# EAGLE board MegaShieldTrio (EAGLE 6.4)

Size 99.82 x 80.01 mm. Coordinates in mm from the lower left corner, seen from the top.
Outline: 10.16,65.28 10.16,66.29
Outline: 6.35,80 0,80 0,0 99.82,0 99.82,79.5 arc90 99.31,80.01 6.35,80
Copper layers (1*16): Top 0.0178mm / dielectric 59mil / Bottom 0.0178mm
Design rules "SSC-EAGLE-2Lyr_v1.0.0.3": minimum track width 6mil, minimum drill 14mil, track to track 6mil, track to pad 6mil, pad to pad 6mil, via to via 6mil, smd to smd 6mil, copper to edge 20mil, drill to drill 16mil, minimum pad ring 8mil, minimum via ring 8mil, stop-mask expansion 3mil, vias tented up to drill 0mil, thermal gap 10mil
Net classes: 0 default: width 0.152 mm, drill 0.305 mm, clearance 0.152 mm
Holes 3.2 mm at 24.13,50.8 30.48,2.54 54.61,17.78 54.61,45.72

## Footprints (pad centres in the part's own frame; a part is rotated, then mirrored left to right if it is on the bottom)
1X15 = drill 1.016 long: 1 -17.78,0; 2 -15.24,0; 3 -12.7,0; 4 -10.16,0; 5 -7.62,0; 6 -5.08,0; 7 -2.54,0; 8 0,0; 9 2.54,0; 10 5.08,0; 11 7.62,0; 12 10.16,0; 13 12.7,0; 14 15.24,0; 15 17.78,0
1X15HEADER = drill 0.8 square: P$1 -17.78,0; P$2 -15.24,0; P$3 -12.7,0; P$4 -10.16,0; P$5 -7.62,0; P$6 -5.08,0; P$7 -2.54,0; P$8 0,0; P$9 2.54,0; P$10 5.08,0; P$11 7.62,0; P$12 10.16,0; P$13 12.7,0; P$14 15.24,0; P$15 17.78,0
1X6HEADER = drill 0.8 square: P$1 0,0; P$2 2.54,0; P$3 5.08,0; P$4 7.62,0; P$5 10.16,0; P$6 12.7,0
1X08 = drill 1.016 long: 1 -8.89,0; 2 -6.35,0; 3 -3.81,0; 4 -1.27,0; 5 1.27,0; 6 3.81,0; 7 6.35,0; 8 8.89,0
1X8HEADER = drill 0.8 square: P$1 0,0; P$2 2.54,0; P$3 5.08,0; P$4 7.62,0; P$5 10.16,0; P$6 12.7,0; P$7 15.24,0; P$8 17.78,0
1X05 = drill 1.016 long: 1 -5.08,0; 2 -2.54,0; 3 0,0; 4 2.54,0; 5 5.08,0
2X09 = drill 1.016 octagon: 1 -10.16,-1.27; 2 -10.16,1.27; 3 -7.62,-1.27; 4 -7.62,1.27; 5 -5.08,-1.27; 6 -5.08,1.27; 7 -2.54,-1.27; 8 -2.54,1.27; 9 0,-1.27; 10 0,1.27; 11 2.54,-1.27; 12 2.54,1.27; 13 5.08,-1.27; 14 5.08,1.27; 15 7.62,-1.27; 16 7.62,1.27; 17 10.16,-1.27; 18 10.16,1.27
2X08 = drill 1.016 octagon: 1 -8.89,-1.27; 2 -8.89,1.27; 3 -6.35,-1.27; 4 -6.35,1.27; 5 -3.81,-1.27; 6 -3.81,1.27; 7 -1.27,-1.27; 8 -1.27,1.27; 9 1.27,-1.27; 10 1.27,1.27; 11 3.81,-1.27; 12 3.81,1.27; 13 6.35,-1.27; 14 6.35,1.27; 15 8.89,-1.27; 16 8.89,1.27
2X03 = drill 1.016 octagon: 1 -2.54,-1.27; 2 -2.54,1.27; 3 0,-1.27; 4 0,1.27; 5 2.54,-1.27; 6 2.54,1.27
JP2 = drill 0.914 long: 1 -2.54,0; 2 0,0; 3 2.54,0
1X10 = drill 1.016 long: 1 -11.43,0; 2 -8.89,0; 3 -6.35,0; 4 -3.81,0; 5 -1.27,0; 6 1.27,0; 7 3.81,0; 8 6.35,0; 9 8.89,0; 10 11.43,0
0207/10 = drill 0.813 octagon: 1 -5.08,0; 2 5.08,0
TSC-112L3H = drill 0.8: COIL1 0,7.62; COIL2 5.08,7.62; COM1 0,0; COM2 5.08,0; NC 5.08,10.16; NO 0,10.16
CHR_UM6 = drill 0.8 square: 3V 0,15.24; D1 20.32,12.7; D2 20.32,10.16; D3 20.32,7.62; D4 20.32,5.08; D5 20.32,2.54; D6 20.32,0; GND 0,5.08; GND2 0,12.7; PGM 20.32,15.24; RX 20.32,17.78; TX 20.32,20.32; VIN 0,2.54
M25H = drill 1.016 octagon: 1 -16.561,1.27; 2 -13.792,1.27; 3 -11.049,1.27; 4 -8.28,1.27; 5 -5.512,1.27; 6 -2.769,1.27; 7 0,1.27; 8 2.769,1.27; 9 5.512,1.27; 10 8.28,1.27; 11 11.049,1.27; 12 13.792,1.27; 13 16.561,1.27; 14 -15.189,-1.27; 15 -12.421,-1.27; 16 -9.652,-1.27; 17 -6.909,-1.27; 18 -4.14,-1.27; 19 -1.372,-1.27; 20 1.372,-1.27; 21 4.14,-1.27; 22 6.909,-1.27; 23 9.652,-1.27; 24 12.421,-1.27; 25 15.189,-1.27 | hole 3.302: 23.52,0; -23.52,0
ODO_JACK = drill 1 square: P$1 4.5,0; P$2 2.5,1.85; P$3 2.5,-1.85 | hole 1.2: 0,0
RJ45-NO-SHIELD = drill 0.9 pad 1.4: 1 -4.445,6.35; 2 -3.175,8.89; 3 -1.905,6.35; 4 -0.635,8.89; 5 0.635,6.35; 6 1.905,8.89; 7 3.175,6.35; 8 4.445,8.89 | hole 3.251: -5.715,0; 5.715,0

## Placement (x,y rotation side)
C3A  C3 Analog  [1X15]  78.74,58.42 0 top
C3A2  1X15HEADER  [1X15HEADER]  78.74,55.88 0 top
C3D  C3 Digital  [1X15]  78.74,73.66 0 top
C3D2  1X15HEADER  [1X15HEADER]  78.74,71.12 0 top
C4A  C4 Analog  [1X15]  80.01,77.47 0 top
C4A2  1X15HEADER  [1X15HEADER]  80.01,68.58 0 top
C4D  C4 Digital  [1X15]  80.01,62.23 180 bottom
C4D2  1X15HEADER  [1X15HEADER]  80.01,64.77 0 top
C4SA0-5  Nano shield  [1X6HEADER]  29.21,7.62 0 top
C4SD0-7  Nano shield  [1X08]  35.56,57.15 0 top
C4SD8-13  Nano shield  [1X8HEADER]  3.81,57.15 0 top
C4SPWR  Nano shield  [1X05]  16.51,7.62 0 top
C5A  C5 Analog  [1X15]  41.91,27.94 90 bottom
C6A0-7  C6 Analog In 0-7  [1X08]  60.96,50.8 0 top
C6A8-15  C6 Analog In 8-15  [1X08]  38.1,50.8 0 top
C6D0-7  GPS  [1X08]  66.04,2.54 180 top
C6D8-13  C6D8-13  [1X08]  88.9,2.54 180 top
C6D14-21  C6 Digital 14-21  [1X08]  43.18,2.54 180 top
C6D14-21_2  C5D  [1X8HEADER]  34.29,5.08 0 top
C6D22-37  C6 Digital 22-37  [2X09]  25.4,12.7 270 top
C6D38-53  C6 Digital 38-53  [2X09]  25.4,35.56 90 top
C6D70-77  Max32  [2X08]  66.04,6.35 0 top
C6D78-85  Max32  [2X08]  88.9,6.35 0 top
ICSP  C6  [2X03]  53.34,60.96 180 bottom
JP1  [JP2]  34.29,43.18 0 top
JP2  [JP2]  34.29,46.99 0 top
JP3  [JP2]  34.29,39.37 0 top
JP4  [1X8HEADER]  21.59,12.7 90 top
MOUSE  Visual odometry  [1X10]  13.97,39.37 270 top
POWER  C6 Power  [1X08]  83.82,50.8 0 top
R1  1 M  [0207/10]  10.16,64.77 270 top
R2  1 M  [0207/10]  17.78,64.77 270 top
R3  1 M  [0207/10]  19.05,39.37 90 top
RL1  V23040--B201TSC  [TSC-112L3H]  16.51,12.7 0 bottom
U$4  CHR_UM6  [CHR_UM6]  21.59,57.15 0 bottom
X1  Vehicle control  [M25H]  5.08,26.67 270 top
X2  ODO_JACK  [ODO_JACK]  8.89,76.2 270 top
X3  ODO_JACK  [ODO_JACK]  15.24,76.2 270 top
X4  RJ45-8L-B  [RJ45-NO-SHIELD]  49.53,74.93 180 top
X5  RJ45-8L-B  [RJ45-NO-SHIELD]  31.75,74.93 180 top

## Library data of the parts
C3A C3D C4A C4D C4SD0-7 C4SPWR C5A C6A0-7 C6A8-15 C6D0-7 C6D8-13 C6D14-21 C6D22-37 C6D38-53 C6D70-77 C6D78-85 ICSP MOUSE POWER = pinhead
C3A2 C3D2 C4A2 C4D2 C4SA0-5 C4SD8-13 C6D14-21_2 JP4 RL1 U$4 X2 X3 = Elcano
JP1-JP3 = jumper
R1-R3 = rcl
X1 = con-subd; OC_FARNELL: unknown; OC_NEWARK: unknown
X4 X5 = con-tycoelectronics; MF: TYCO ELECTRONICS; MPN: RJ45-8L-B; OC_FARNELL: 1279843; OC_NEWARK: 52K4445

## Nets
3.3V: C3A2.P$14 C3A.14 C4A2.P$14 C4A.14 C4SPWR.2 MOUSE.3 POWER.5 RL1.NC
4D5_6A14: C4D2.P$8 C4D.8 C4SD0-7.6
4D6_6A15: C4D2.P$9 C4D.9 C4SD0-7.7
4D7_6D43: C4D2.P$10 C4D.10 C4SD0-7.8 C6D38-53.6
6D10_2A6: C6D8-13.6 X1.23
+5V: C3A2.P$4 C3A.4 C4A2.P$4 C4A.4 C4SPWR.3 C6D22-37.17 C6D22-37.18 ICSP.2 MOUSE.2 POWER.4 R1.2 R2.2 RL1.NO U$4.VIN X1.24
AREF: C3A2.P$13 C3A.13 C4A2.P$13 C4A.13 C4SD8-13.P$1 C5A.13 C6D8-13.1
C2STAT: C6D14-21.4 C6D14-21_2.P$5 X1.19
C4AVL: C3D2.P$5 C3D.5 C4D2.P$6 C4D.6 C4SD0-7.4 C6D22-37.3
C4D11: C4D2.P$14 C4D.14 C4SD8-13.P$5
C4D12: C4D2.P$15 C4D.15 C4SD8-13.P$4
C6AVL: C4D2.P$5 C4D.5 C4SD0-7.3 C6D22-37.16
C6D29: C6D22-37.10 JP4.P$1
C6D31: C6D22-37.8 JP4.P$2
C6D33: C6D22-37.6 JP4.P$3
C6D35: C6D22-37.4 JP4.P$4
C6D37: C6D22-37.2 JP4.P$5
CHN1: C3D2.P$7 C3D.7 C6D38-53.1 X4.2
CHN2: C3D2.P$6 C3D.6 C6D22-37.1 X5.2
CLICK1: C6D0-7.6 R2.1 X1.21 X3.P$1
CLICK2: C6D0-7.5 R1.1 X1.14 X2.P$1
CRS_BRK: C3D2.P$8 C3D.8 C6A0-7.6 C6D0-7.3 C6D38-53.3 X1.7
CRS_REV: C3D2.P$11 C3D.11 C6D38-53.9 X1.13
CRS_STR: C3D2.P$9 C3D.9 C6A0-7.7 C6D38-53.5 X1.6
CRS_THR: C3D2.P$12 C3D.12 C6A0-7.8 C6D38-53.8 C6D38-53.11 X1.8
D39: C3D2.P$15 C3D.15 C4D2.P$13 C4D.13 C4SD8-13.P$6 C6D38-53.2 JP4.P$6 X1.12
D41: C4D2.P$11 C4D.11 C4SD8-13.P$8 C6D38-53.4 JP2.3 JP4.P$7 X1.11
DRV_CMD: C3D2.P$1 C3D.1 C6D22-37.11 X1.18
F2RNG: C3A2.P$10 C3A.10 C4A2.P$10 C4A.10 C4SA0-5.P$6 C5A.5 C6A8-15.8 X5.4
F_RNG: C3A2.P$5 C3A.5 C4A2.P$5 C4A.5 C4SA0-5.P$1 C5A.10 C6A0-7.1 X4.4
FL2RNG: C5A.6 C6A8-15.7 X5.5
FL_RNG: C3A2.P$6 C3A.6 C4A2.P$6 C4A.6 C4SA0-5.P$2 C6A0-7.2 X4.5
FR2RNG: C5A.7 C6A8-15.6 X5.6
FR_RNG: C3A2.P$7 C3A.7 C4A2.P$7 C4A.7 C4SA0-5.P$3 C6A0-7.3 X4.6
GND: C3A2.P$2 C3A.2 C3D2.P$4 C3D.4 C4A2.P$2 C4A.2 C4D2.P$4 C4D.4 C4SD8-13.P$2 C4SPWR.4 C4SPWR.5 C5A.2 C6D8-13.2 C6D22-37.5 C6D38-53.18 ICSP.6 JP2.1 MOUSE.1 POWER.2 POWER.3 U$4.GND U$4.GND2 X1.25 X2.P$2 X2.P$3 X3.P$2 X3.P$3 X4.3 X5.3
GPS_CNTRL: C6D14-21.1 C6D14-21_2.P$8 U$4.D1
GPS_LOC: C6D14-21.2 C6D14-21_2.P$7 U$4.D2
GPS_PWR: C6D8-13.7
INU_BRN: C6D14-21.6 C6D14-21_2.P$3 U$4.TX
INU_CNTRL: C6D14-21.5 C6D14-21_2.P$4 U$4.RX
INU_SS: C6D22-37.12 U$4.D6
L2RNG: C3A2.P$11 C3A.11 C4A2.P$11 C4A.11 C5A.8 X5.7
L_RNG: C3A2.P$8 C3A.8 C4A2.P$8 C4A.8 C4SA0-5.P$4 C5A.11 C6A0-7.4 X4.7
LED1: C6D8-13.8 X1.5
LED3: C3A2.P$15 C3A.15 X1.4
LED4: C4A2.P$15 C4A.15 C4SD8-13.P$3 X1.3
LED5: C5A.15 C6D38-53.12 MOUSE.10 X1.2
LED6: C6D22-37.13 X1.1
LED7: C6D22-37.15 X1.15
LED8: C6D14-21.8 C6D14-21_2.P$1 X1.16
MISO: C6D8-13.4 ICSP.1 JP3.1 MOUSE.5 U$4.D4
MOSI: C6D8-13.5 C6D38-53.14 ICSP.4 MOUSE.6 U$4.D3
MOUSE_SS: C6D38-53.16 MOUSE.4
MOV_OK: C3D2.P$13 C3D.13 C4SD0-7.5 C6D0-7.4 JP3.3 X1.17
N$1: C4A2.P$3 C4A.3 C4D2.P$3 C4D.3 C4SPWR.1
N$2: C4D2.P$7 C4D.7
N$4: C6D38-53.15 JP1.2
N$5: C6D38-53.13 JP3.2
N$6: C6D38-53.17 JP2.2
N$7: C6D14-21.7 C6D14-21_2.P$2
N$8: R3.1 RL1.COIL1
N$23: C6D78-85.1 C6D78-85.2
N$24: C6D78-85.3 C6D78-85.4
N$28: C6D78-85.5 C6D78-85.6
N$30: C6D78-85.7 C6D78-85.8
N$31: C6D78-85.9 C6D78-85.10
N$37: C6D78-85.11 C6D78-85.12
N$38: C6D78-85.13 C6D78-85.14
N$39: C6D78-85.15 C6D78-85.16
N$41: C6D70-77.1 C6D70-77.2
N$44: C6D70-77.3 C6D70-77.4
N$45: C6D70-77.5 C6D70-77.6
N$46: C6D70-77.7 C6D70-77.8
N$47: C6D70-77.9 C6D70-77.10
N$48: C6D70-77.11 C6D70-77.12
N$49: C6D70-77.13 C6D70-77.14
N$50: C6D70-77.15 C6D70-77.16
NAV_FIX: C4D2.P$2 C4D.2 C4SD0-7.1 C6D14-21.3 C6D14-21_2.P$6
NPD: C6D38-53.10 MOUSE.9
PATH: C3D2.P$2 C3D.2 C4D2.P$1 C4D.1 C4SD0-7.2 C6D22-37.9
PWR_SEL: C3D2.P$10 C3D.10 C6D38-53.7 RL1.COIL2
R2RNG: C3A2.P$12 C3A.12 C4A2.P$12 C4A.12 C5A.9 C6A8-15.4 X5.8
R_RNG: C3A2.P$9 C3A.9 C4A2.P$9 C4A.9 C4SA0-5.P$5 C5A.12 C6A0-7.5 X4.8
RESET: C3A2.P$3 C3A.3 C3D2.P$3 C3D.3 C5A.3 C6D22-37.7 ICSP.5 MOUSE.8 POWER.6
SCK: C6D8-13.3 ICSP.3 JP1.1 MOUSE.7 U$4.D5
SNR_PWR: RL1.COM2 X4.1 X5.1
SPD_LMT: C4D2.P$12 C4D.12 C4SD8-13.P$7 X1.9
SPEED: C3D2.P$14 C3D.14 C6A8-15.3 JP1.3 X1.10
VBIT0: C6A8-15.2
VBIT1: C6A8-15.1
VIN: C3A2.P$1 C3A.1 C4A2.P$1 C4A.1 C5A.1 C6D22-37.14 POWER.1
VIS_IN: X1.20
VIS_OUT: C6D0-7.7 X1.22

## Tracks (layer width: path | path; a pad name or v marks a point on that pad's centre or on a via)
3.3V  (7 unrouted)
4D5_6A14  (2 unrouted)
4D6_6A15  (2 unrouted)
4D7_6D43  (3 unrouted)
6D10_2A6  (1 unrouted)
+5V  (14 unrouted)
AREF  (6 unrouted)
C2STAT  (2 unrouted)
C4AVL  (5 unrouted)
C4D11  (2 unrouted)
C4D12  (2 unrouted)
C6AVL  (3 unrouted)
C6D29  (1 unrouted)
C6D31  (1 unrouted)
C6D33  (1 unrouted)
C6D35  (1 unrouted)
C6D37  (1 unrouted)
CHN1  (3 unrouted)
CHN2  (3 unrouted)
CLICK1  (3 unrouted)
CLICK2  (3 unrouted)
CRS_BRK  (5 unrouted)
CRS_REV  (3 unrouted)
CRS_STR  (4 unrouted)
CRS_THR  (5 unrouted)
D39  (7 unrouted)
D41  (6 unrouted)
DRV_CMD  (3 unrouted)
F2RNG  (7 unrouted)
F_RNG  (7 unrouted)
FL2RNG  (2 unrouted)
FL_RNG  (6 unrouted)
FR2RNG  (2 unrouted)
FR_RNG  (6 unrouted)
GND  (28 unrouted)
GPS_CNTRL  (2 unrouted)
GPS_LOC  (2 unrouted)
INU_BRN  (2 unrouted)
INU_CNTRL  (2 unrouted)
INU_SS  (1 unrouted)
L2RNG  (5 unrouted)
L_RNG  (7 unrouted)
LED1  (1 unrouted)
LED3  (2 unrouted)
LED4  (3 unrouted)
LED5  (3 unrouted)
LED6  (1 unrouted)
LED7  (1 unrouted)
LED8  (2 unrouted)
MISO  (4 unrouted)
MOSI  (4 unrouted)
MOUSE_SS  (1 unrouted)
MOV_OK  (5 unrouted)
N$1  (4 unrouted)
N$2  (1 unrouted)
N$4  (1 unrouted)
N$5  (1 unrouted)
N$6  (1 unrouted)
N$7  (1 unrouted)
N$8  (1 unrouted)
N$23  (1 unrouted)
N$24  (1 unrouted)
N$28  (1 unrouted)
N$30  (1 unrouted)
N$31  (1 unrouted)
N$37  (1 unrouted)
N$38  (1 unrouted)
N$39  (1 unrouted)
N$41  (1 unrouted)
N$44  (1 unrouted)
N$45  (1 unrouted)
N$46  (1 unrouted)
N$47  (1 unrouted)
N$48  (1 unrouted)
N$49  (1 unrouted)
N$50  (1 unrouted)
NAV_FIX  (4 unrouted)
NPD  (1 unrouted)
PATH  (5 unrouted)
PWR_SEL  (3 unrouted)
R2RNG  (6 unrouted)
R_RNG  (7 unrouted)
RESET  (8 unrouted)
SCK  (4 unrouted)
SNR_PWR  (2 unrouted)
SPD_LMT  (3 unrouted)
SPEED  (4 unrouted)
VIN  (6 unrouted)
VIS_OUT  (1 unrouted)

## Text on the board
tNames: Made in USA